# EAGLE board brick_serial_wifi (EAGLE 7.4.0)
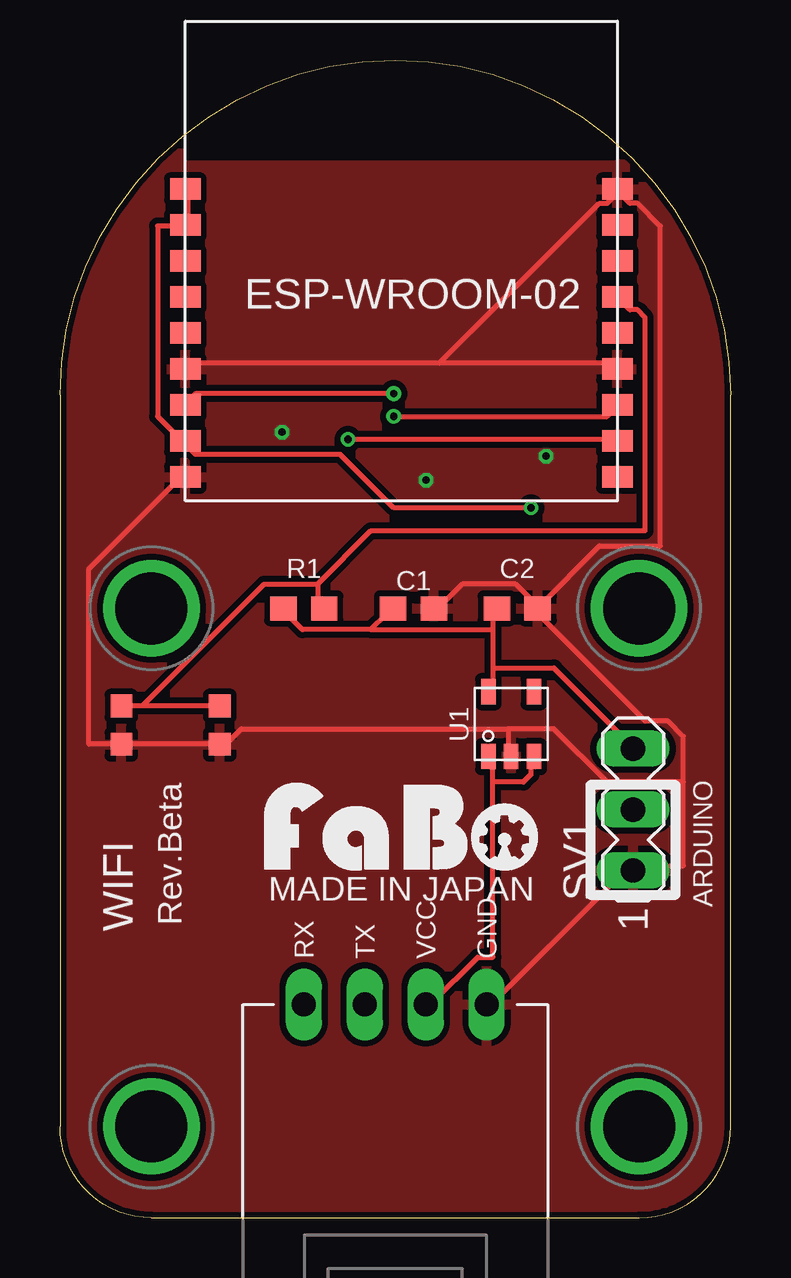
[diagram p0: board, top side]
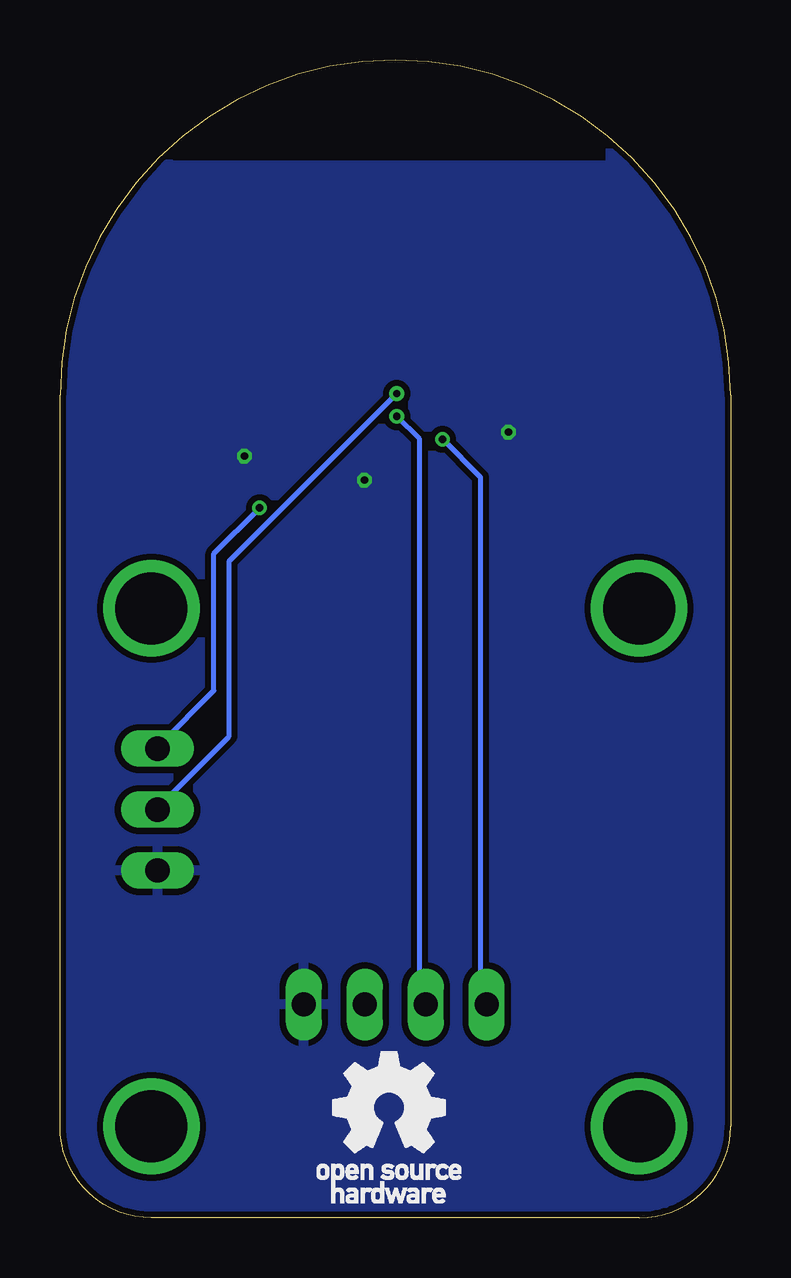
[diagram p1: board, bottom side, seen from below]

Size 27.94 x 48.26 mm. Coordinates in mm from the lower left corner, seen from the top.
Copper layers (1*16): Top 0.035mm / dielectric 1.5mm / Bottom 0.035mm
Design rules "Elecrow_2-layer_eagle_rule": minimum track width 6mil, minimum drill 12mil, track to track 6mil, track to pad 6mil, pad to pad 6mil, via to via 6mil, smd to smd 0mil, copper to edge 10mil, drill to drill 10mil, minimum pad ring 10mil, minimum via ring 6mil, stop-mask expansion 2mil, vias tented up to drill 100mil, thermal gap 10mil
Net classes: 0 default: width 0.203 mm, clearance 0.254 mm

## Footprints (pad centres in the part's own frame; a part is rotated, then mirrored left to right if it is on the bottom)
EIA0603 = smd 1.1 x 1: 1 -0.85,0; 2 0.85,0
FABO_BRICK_SERIAL_LONG = drill 1 long: GND 3.81,-8.89; RX -3.81,-8.89; TX -1.27,-8.89; VCC 1.27,-8.89 | drill 3 pad 3.81: P$5 -10.16,7.62; P$6 10.16,7.62; P$7 -10.16,-13.97; P$8 10.16,-13.97
MA03-1 = drill 1.016 long: 1 -2.54,0; 2 0,0; 3 2.54,0
SOT_23_5 = smd 0.6 x 1.05: 1 -0.95,-1.35; 2 0,-1.35; 3 0.95,-1.35; 4 0.95,1.35; 5 -0.95,1.35
ES-ESPWROOM02 = smd 1.27 x 0.9: 1 -9,3; 2 -9,1.5; 3 -9,0; 4 -9,-1.5; 5 -9,-3; 6 -9,-4.5; 7 -9,-6; 8 -9,-7.5; 9 -9,-9; 10 9,-9; 11 9,-7.5; 12 9,-6; 13 9,-4.5; 14 9,-3; 15 9,-1.5; 16 9,0; 17 9,1.5; 18 9,3
SWITCH-4P(KMR2) = smd 0.9 x 0.95: 1 -1,0; 2 3.1,0; 3 -1,-1.6; 4 3.1,-1.6

## Placement (x,y rotation side)
C1  1uF  [EIA0603]  14.73,25.4 0 top
C2  0.1uf  [EIA0603]  19.05,25.4 0 top
J1  [FABO_BRICK_SERIAL_LONG]  13.97,17.78 0 top
R1  4.7k  [EIA0603]  10.16,25.4 0 top
SV1  [MA03-1]  23.88,17.02 90 top
U1  [SOT_23_5]  18.8,20.57 0 top
U$1  ES-ESPWROOM02  [ES-ESPWROOM02]  14.22,39.88 0 top
U$3  [LOGO_FABO_M]  14.22,14.48 0 top
U$4  [LOGO_OSHW_T_M_BOTTOM]  14.22,4.57 0 top
U$7  SWICTH-4P(KMR2)  [SWITCH-4P(KMR2)]  3.56,21.34 0 top

## Library data of the parts
C1 C2 R1 U$3 U$4 = FaBo-etc
J1 = FaBo-Template
SV1 = con-lstb; OC_FARNELL: unknown; OC_NEWARK: unknown
U1 = FaBo-Supply
U$1 = FaBo-Wifi
U$7 = gclue

## Nets
3V3: C1.1 C2.1 R1.1 SV1.3 U1.5 U$1.1 U$1.2 U$1.8
GND: C1.2 C2.2 J1.GND SV1.1 U1.2 U$1.6 U$1.9 U$1.13 U$1.18 U$7.3 U$7.4
IO2: SV1.2 U$1.7
N$5: J1.VCC U1.1 U1.3
RESET: R1.2 U$1.15 U$7.1 U$7.2
RX: J1.RX U$1.11
TX: J1.TX U$1.12

## Tracks (layer width: path | path; a pad name or v marks a point on that pad's centre or on a via)
3V3  (via drill 0.3)
  Top 0.203: U$1.1 5.33,42.61 5.33,41.66 U$1.2 5.02,41.34 4.06,41.34 4.06,33.4 5.02,32.45 U$1.8 5.33,32.13 5.65,31.81 11.68,31.81 13.91,29.59 v19.62,29.59 | 18.03,24.51 18.03,25.15 C2.1 | 18.03,24.51 18.03,22.92 | 18.03,22.92 18.03,21.97 U1.5 | 12.95,24.51 10.1,24.51 9.46,25.15 R1.1 | 12.95,24.51 13.59,25.15 C1.1 | 12.95,24.51 18.03,24.51 | 18.03,22.92 20.57,22.92 23.75,19.75 SV1.3
  Bottom 0.203: v19.62,29.59 21.53,27.69 21.53,21.97 23.75,19.75 SV1.3
GND  (via drill 0.3)
  Top 0.203: 18.67,20.38 18.67,19.43 U1.2 | 18.67,20.38 7.56,20.38 6.92,19.75 U$7.4 6.6,19.75 2.79,19.75 U$7.3 2.48,19.75 1.21,19.75 1.21,27.05 5.02,30.86 U$1.9 | 15.81,35.62 23.11,35.62 U$1.13 | 15.81,35.62 5.33,35.62 U$1.6 | 15.81,35.62 22.48,42.29 22.8,42.29 23.11,42.61 U$1.18 23.43,42.61 23.75,42.29 24.07,42.29 25.02,41.34 25.02,28 22.48,28 19.94,25.46 | 19.94,25.46 18.99,26.42 16.76,26.42 15.81,25.46 C1.2 | 25.97,18.16 25.97,14.67 24.07,14.67 SV1.1 23.75,14.35 23.43,14.35 18.03,8.95 J1.GND | 25.97,18.16 25.97,20.07 25.34,20.7 24.38,20.7 19.94,25.15 C2.2 19.94,25.46 | 18.67,20.38 20.57,20.38 22.8,18.16 25.97,18.16
  other vias: 9.25,32.75 15.25,30.75 20.25,31.75
  pour Top: 0.25,-0.25 28.25,-0.25 28.25,47.75 0.25,47.75
  pour Bottom: 0.25,-0.25 28.25,-0.25 28.25,47.75 0.25,47.75
IO2  (via drill 0.3)
  Top 0.203: v13.91,34.35 5.65,34.35 5.33,34.04 U$1.7
  Bottom 0.203: v13.91,34.35 20.89,27.37 20.89,20.07 23.75,17.21 SV1.2
N$5
  Top 0.203: 18.03,18.16 18.03,19.11 U1.1 | 18.03,18.16 19.3,18.16 19.62,18.48 19.62,19.11 U1.3 | 18.03,18.16 18.03,10.86 17.4,10.86 15.49,8.95 J1.VCC
RESET
  Top 0.203: U$7.2 3.43,21.34 | 3.43,21.34 U$7.1 | 10.73,26.42 10.73,25.46 R1.2 | 10.73,26.42 8.51,26.42 3.43,21.34 | 10.73,26.42 12.95,28.64 24.38,28.64 24.38,37.53 24.07,37.85 23.75,37.85 23.43,38.16 U$1.15
RX  (via drill 0.3)
  Top 0.203: v12,32.45 23.11,32.45 U$1.11
  Bottom 0.203: v12,32.45 10.41,30.86 10.41,8.95 J1.RX
TX  (via drill 0.3)
  Top 0.203: v13.91,33.4 22.8,33.4 23.11,33.72 U$1.12
  Bottom 0.203: v13.91,33.4 12.95,32.45 12.95,8.95 J1.TX

## Text on the board
tPlace: MADE IN JAPAN | ARDUINO | WIFI | Rev.Beta